# EAGLE board 312 Module 2 Task 2 (EAGLE 9.7.0)

Size 243.99 x 174.41 mm. Coordinates in mm from the lower left corner, seen from the top.
Outline: 0,0 243.99,0 243.99,174.41 0,174.41 0,0
Copper layers (1*16): Top 0.035mm / dielectric 1.5mm / Bottom 0.035mm
Design rules "default": minimum track width 6mil, minimum drill 0.35mm, track to track 6mil, track to pad 6mil, pad to pad 6mil, via to via 6mil, smd to smd 6mil, copper to edge 40mil, drill to drill 6mil, minimum pad ring 10mil, minimum via ring 8mil, stop-mask expansion 4mil, vias tented up to drill 0mil, thermal gap 10mil

## Footprints (pad centres in the part's own frame; a part is rotated, then mirrored left to right if it is on the bottom)
7SEG-13 = drill 0.813 long: 1 -5.08,-7.62; 2 -2.54,-7.62; 3 0,-7.62; 4 2.54,-7.62; 5 5.08,-7.62; 6 5.08,7.62; 7 2.54,7.62; 8 0,7.62; 9 -2.54,7.62; 10 -5.08,7.62
BATTERY-GENERIC = drill 1.118 pad 3.15 octagon: + 2.54,0; - -2.54,0
RESAD1016W63L850D250B = drill 0.83 pad 1.43: 1 -5.08,0; 2 5.08,0
SWITCH-MOMENTARY-PTH-6.5MM = drill 1.016 pad 1.88: 1 -3.251,2.261; 2 3.251,2.261; 3 -3.251,-2.261; 4 3.251,-2.261
DIP762W53P254L1969H508Q16B = drill 0.743 pad 1.343: 1 -3.81,8.89; 2 -3.81,6.35; 3 -3.81,3.81; 4 -3.81,1.27; 5 -3.81,-1.27; 6 -3.81,-3.81; 7 -3.81,-6.35; 8 -3.81,-8.89; 9 3.81,-8.89; 10 3.81,-6.35; 11 3.81,-3.81; 12 3.81,-1.27; 13 3.81,1.27; 14 3.81,3.81; 15 3.81,6.35; 16 3.81,8.89
ARDUINO-UNO-R3-SHIELD = drill 1.016 pad 1.88: 3.3V 24.13,-2.54; 5V 24.13,0; A0 24.13,12.7; A1 24.13,15.24; A2 24.13,17.78; A3 24.13,20.32; A4 24.13,22.86; A5 24.13,25.4; AREF -24.13,-13.97; D2 -24.13,20.32; D3 -24.13,17.78; D4 -24.13,15.24; D5 -24.13,12.7; D6 -24.13,10.16; D7 -24.13,7.62; D8 -24.13,3.81; D9 -24.13,1.27; D10 -24.13,-1.27; D11 -24.13,-3.81; D12 -24.13,-6.35; D13 -24.13,-8.89; GND@0 24.13,2.54; GND@1 24.13,5.08; GND@2 -24.13,-11.43; IOREF 24.13,-7.62; NC 24.13,-10.16; RES 24.13,-5.08; RX -24.13,25.4; SCL -24.13,-19.05; SDA -24.13,-16.51; TX -24.13,22.86; VIN 24.13,7.62

## Placement (x,y rotation side)
DIGIT1  7SEG-CK  [7SEG-13]  161.97,155.38 0 top
DIGIT2  7SEG-CK  [7SEG-13]  224.86,154.41 0 top
DIGIT3  7SEG-CK  [7SEG-13]  91.52,152.41 0 top
P1  BATTERYGENERIC  [BATTERY-GENERIC]  8.26,141.48 180 top
R1  220  [RESAD1016W63L850D250B]  81.36,139.71 0 top
R2  220  [RESAD1016W63L850D250B]  101.68,139.71 0 top
R3  220  [RESAD1016W63L850D250B]  83.9,142.25 0 top
R4  100  [RESAD1016W63L850D250B]  99.14,142.25 0 top
R5  220  [RESAD1016W63L850D250B]  81.36,162.57 0 top
R6  220  [RESAD1016W63L850D250B]  83.9,165.11 0 top
R7  220  [RESAD1016W63L850D250B]  99.14,165.11 0 top
R8  1k  [RESAD1016W63L850D250B]  30.02,81.34 90 top
R9  1k  [RESAD1016W63L850D250B]  32.56,81.34 90 top
R10  220  [RESAD1016W63L850D250B]  101.68,162.57 0 top
R11  1000  [RESAD1016W63L850D250B]  24.94,116.9 90 top
R12  1k  [RESAD1016W63L850D250B]  57.96,81.34 90 top
R13  1k  [RESAD1016W63L850D250B]  60.5,81.34 90 top
R14  1k  [RESAD1016W63L850D250B]  85.9,81.34 90 top
R15  1k  [RESAD1016W63L850D250B]  88.44,81.34 90 top
R17  1000  [RESAD1016W63L850D250B]  52.88,116.9 90 top
R18  1000  [RESAD1016W63L850D250B]  80.82,116.9 90 top
R19  100  [RESAD1016W63L850D250B]  172.13,140.14 0 top
R20  100  [RESAD1016W63L850D250B]  169.59,142.68 0 top
R21  100  [RESAD1016W63L850D250B]  151.81,140.14 0 top
R22  100  [RESAD1016W63L850D250B]  154.35,142.68 0 top
R23  100  [RESAD1016W63L850D250B]  154.35,165.54 0 top
R24  100  [RESAD1016W63L850D250B]  169.59,165.54 0 top
R25  100  [RESAD1016W63L850D250B]  172.13,168.08 0 top
R26  100  [RESAD1016W63L850D250B]  151.81,168.08 0 top
R27  100  [RESAD1016W63L850D250B]  214.7,144.25 0 top
R28  100  [RESAD1016W63L850D250B]  217.24,141.71 0 top
R29  100  [RESAD1016W63L850D250B]  232.48,144.25 0 top
R30  100  [RESAD1016W63L850D250B]  235.02,141.71 0 top
R31  100  [RESAD1016W63L850D250B]  214.7,164.57 0 top
R32  100  [RESAD1016W63L850D250B]  217.24,167.11 0 top
R33  100  [RESAD1016W63L850D250B]  232.48,167.11 0 top
R34  100  [RESAD1016W63L850D250B]  235.02,164.57 0 top
S1  SWITCH_MOMENTARY  [SWITCH-MOMENTARY-PTH-6.5MM]  132.27,18.87 90 top
U1  CD4511_PDIP  [DIP762W53P254L1969H508Q16B]  33.83,100.39 90 top
U2  CD4511_PDIP  [DIP762W53P254L1969H508Q16B]  61.77,100.39 90 top
U3  CD4511_PDIP  [DIP762W53P254L1969H508Q16B]  89.71,100.39 90 top
U4  ARDUINO-UNO-R3-SHIELD  [ARDUINO-UNO-R3-SHIELD]  68.37,29.84 270 top

## Library data of the parts
DIGIT1-DIGIT3 = Tinkercad; CATEGORY: Opto-Electronic; SUB-CATEGORY: Display; TYPE: 7-Segment
P1 R1-R15 R17-R34 S1 U1-U4 = Tinkercad

## Nets
DIGIT1_A: DIGIT1.7 R24.1
DIGIT1_B: DIGIT1.6 R25.1
DIGIT1_C: DIGIT1.4 R20.1
DIGIT1_CK1: DIGIT1.3 DIGIT2.3
DIGIT1_CK2: DIGIT1.8 DIGIT3.8
DIGIT1_D: DIGIT1.2 R22.2
DIGIT1_DP: DIGIT1.5 R19.1
DIGIT1_E: DIGIT1.1 R21.2
DIGIT1_F: DIGIT1.9 R23.2
DIGIT1_G: DIGIT1.10 R26.2
DIGIT2_A: DIGIT2.7 R33.1
DIGIT2_B: DIGIT2.6 R34.1
DIGIT2_C: DIGIT2.4 R29.1
DIGIT2_D: DIGIT2.2 R28.2
DIGIT2_DP: DIGIT2.5 R30.1
DIGIT2_E: DIGIT2.1 R27.2
DIGIT2_F: DIGIT2.9 R32.2
DIGIT2_G: DIGIT2.10 R31.2
DIGIT3_A: DIGIT3.7 R7.1
DIGIT3_B: DIGIT3.6 R10.1
DIGIT3_C: DIGIT3.4 R4.1
DIGIT3_D: DIGIT3.2 R3.2
DIGIT3_DP: DIGIT3.5 R2.1
DIGIT3_E: DIGIT3.1 R1.2
DIGIT3_F: DIGIT3.9 R6.2
DIGIT3_G: DIGIT3.10 R5.2
P1+: P1.+ R8.1 R9.1 R11.2 R12.1 R13.1 R14.1 R15.1 R17.2 R18.2
P1-: DIGIT3.3 P1.- S1.4 U1.5 U1.8 U2.5 U2.8 U3.5 U3.8 U4.GND@0 U4.GND@1 U4.GND@2
U1_!BL: R9.2 U1.4
U1_!LT: R8.2 U1.3
U1_A: R7.2 U1.13
U1_B: R10.2 U1.12
U1_C: R4.2 U1.11
U1_D: R3.1 U1.10
U1_E: R1.1 U1.9
U1_F: R6.1 U1.15
U1_G: R5.1 U1.14
U1_VDD: R11.1 U1.16
U2_!BL: R13.2 U2.4
U2_!LT: R12.2 U2.3
U2_A: R24.2 U2.13
U2_B: R25.2 U2.12
U2_C: R20.2 U2.11
U2_D: R22.1 U2.10
U2_E: R21.1 U2.9
U2_F: R23.1 U2.15
U2_G: R26.1 U2.14
U2_VDD: R17.1 U2.16
U3_!BL: R15.2 U3.4
U3_!LT: R14.2 U3.3
U3_A: R33.2 U3.13
U3_B: R34.2 U3.12
U3_C: R29.2 U3.11
U3_D: R28.1 U3.10
U3_E: R27.1 U3.9
U3_F: R32.1 U3.15
U3_G: R31.1 U3.14
U3_VDD: R18.1 U3.16
U4_A0: S1.1 U4.A0
U4_D2: U3.7 U4.D2
U4_D3: U3.1 U4.D3
U4_D4: U3.2 U4.D4
U4_D5: U3.6 U4.D5
U4_D6: U2.7 U4.D6
U4_D7: U2.1 U4.D7
U4_D8: U2.2 U4.D8
U4_D9: U2.6 U4.D9
U4_D10: U1.7 U4.D10
U4_D11: U1.1 U4.D11
U4_D12: U1.2 U4.D12
U4_D13: U1.6 U4.D13

## Tracks (layer width: path | path; a pad name or v marks a point on that pad's centre or on a via)
DIGIT1_A  (1 unrouted)
DIGIT1_B  (1 unrouted)
DIGIT1_C  (1 unrouted)
DIGIT1_CK1  (1 unrouted)
DIGIT1_CK2  (1 unrouted)
DIGIT1_D  (1 unrouted)
DIGIT1_DP  (1 unrouted)
DIGIT1_E  (1 unrouted)
DIGIT1_F  (1 unrouted)
DIGIT1_G  (1 unrouted)
DIGIT2_A  (1 unrouted)
DIGIT2_B  (1 unrouted)
DIGIT2_C  (1 unrouted)
DIGIT2_D  (1 unrouted)
DIGIT2_DP  (1 unrouted)
DIGIT2_E  (1 unrouted)
DIGIT2_F  (1 unrouted)
DIGIT2_G  (1 unrouted)
DIGIT3_A  (1 unrouted)
DIGIT3_B  (1 unrouted)
DIGIT3_C  (1 unrouted)
DIGIT3_D  (1 unrouted)
DIGIT3_DP  (1 unrouted)
DIGIT3_E  (1 unrouted)
DIGIT3_F  (1 unrouted)
DIGIT3_G  (1 unrouted)
P1+  (9 unrouted)
P1-  (11 unrouted)
U1_!BL  (1 unrouted)
U1_!LT  (1 unrouted)
U1_A  (1 unrouted)
U1_B  (1 unrouted)
U1_C  (1 unrouted)
U1_D  (1 unrouted)
U1_E  (1 unrouted)
U1_F  (1 unrouted)
U1_G  (1 unrouted)
U1_VDD  (1 unrouted)
U2_!BL  (1 unrouted)
U2_!LT  (1 unrouted)
U2_A  (1 unrouted)
U2_B  (1 unrouted)
U2_C  (1 unrouted)
U2_D  (1 unrouted)
U2_E  (1 unrouted)
U2_F  (1 unrouted)
U2_G  (1 unrouted)
U2_VDD  (1 unrouted)
U3_!BL  (1 unrouted)
U3_!LT  (1 unrouted)
U3_A  (1 unrouted)
U3_B  (1 unrouted)
U3_C  (1 unrouted)
U3_D  (1 unrouted)
U3_E  (1 unrouted)
U3_F  (1 unrouted)
U3_G  (1 unrouted)
U3_VDD  (1 unrouted)
U4_A0  (1 unrouted)
U4_D2  (1 unrouted)
U4_D3  (1 unrouted)
U4_D4  (1 unrouted)
U4_D5  (1 unrouted)
U4_D6  (1 unrouted)
U4_D7  (1 unrouted)
U4_D8  (1 unrouted)
U4_D9  (1 unrouted)
U4_D10  (1 unrouted)
U4_D11  (1 unrouted)
U4_D12  (1 unrouted)
U4_D13  (1 unrouted)